# EAGLE board Sound_Module (EAGLE 7.1.0)
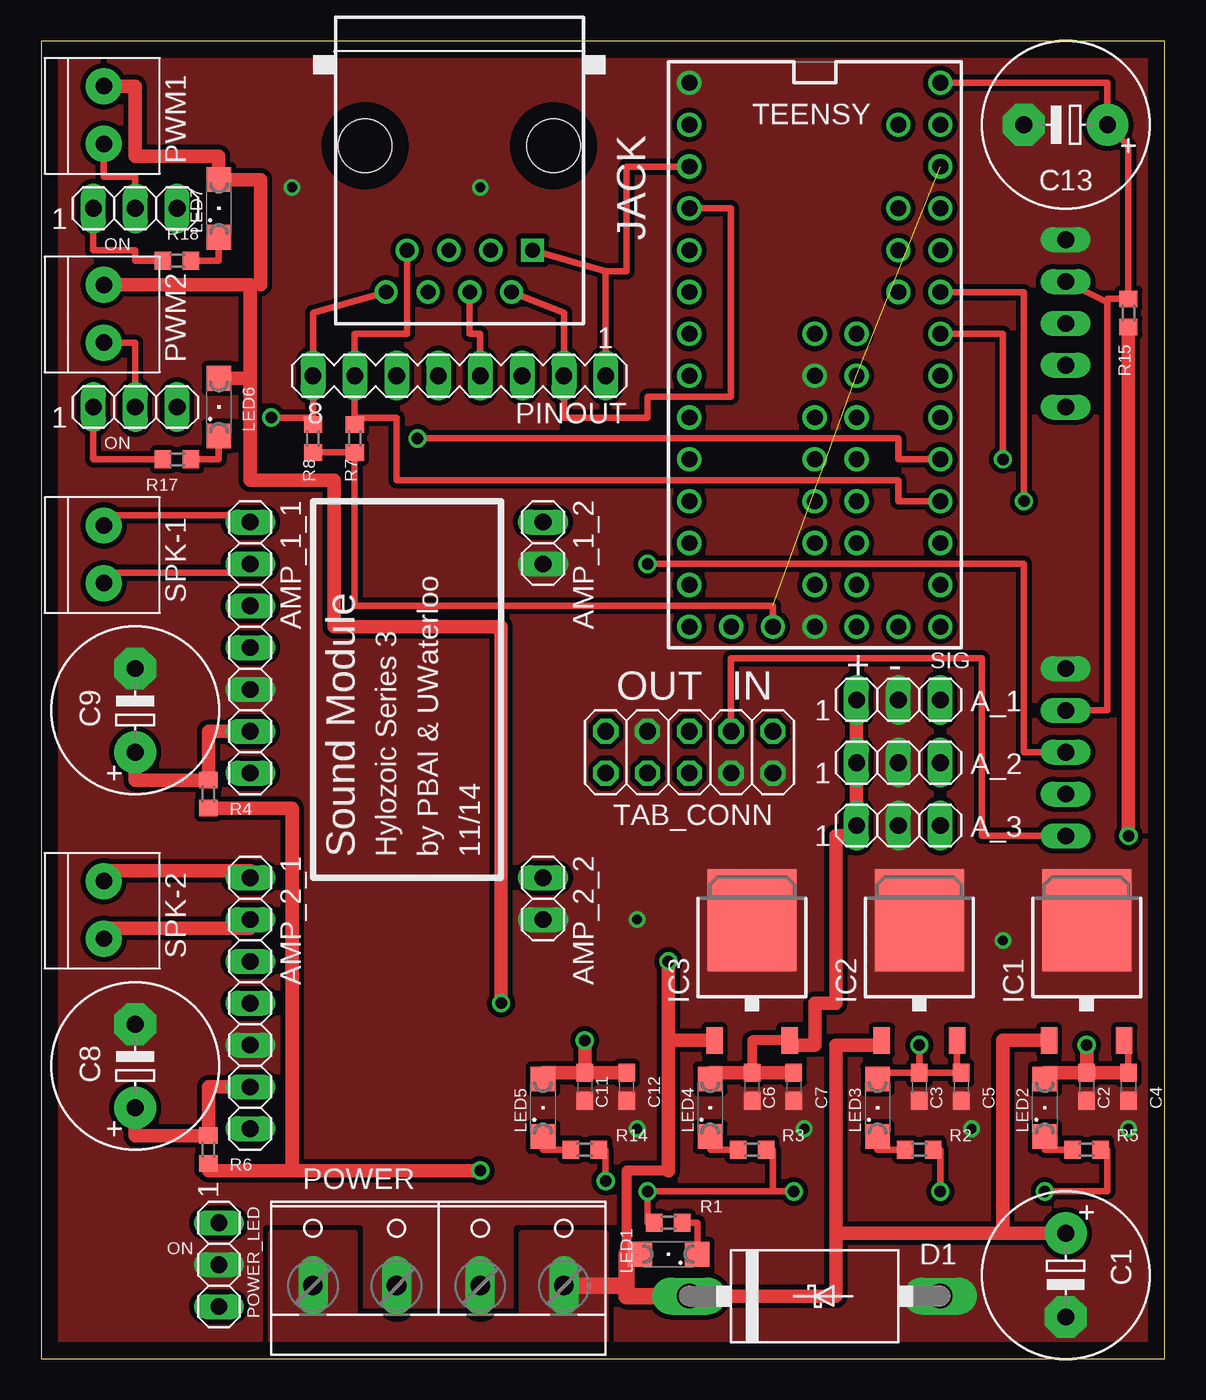
[diagram p0: board, top side]
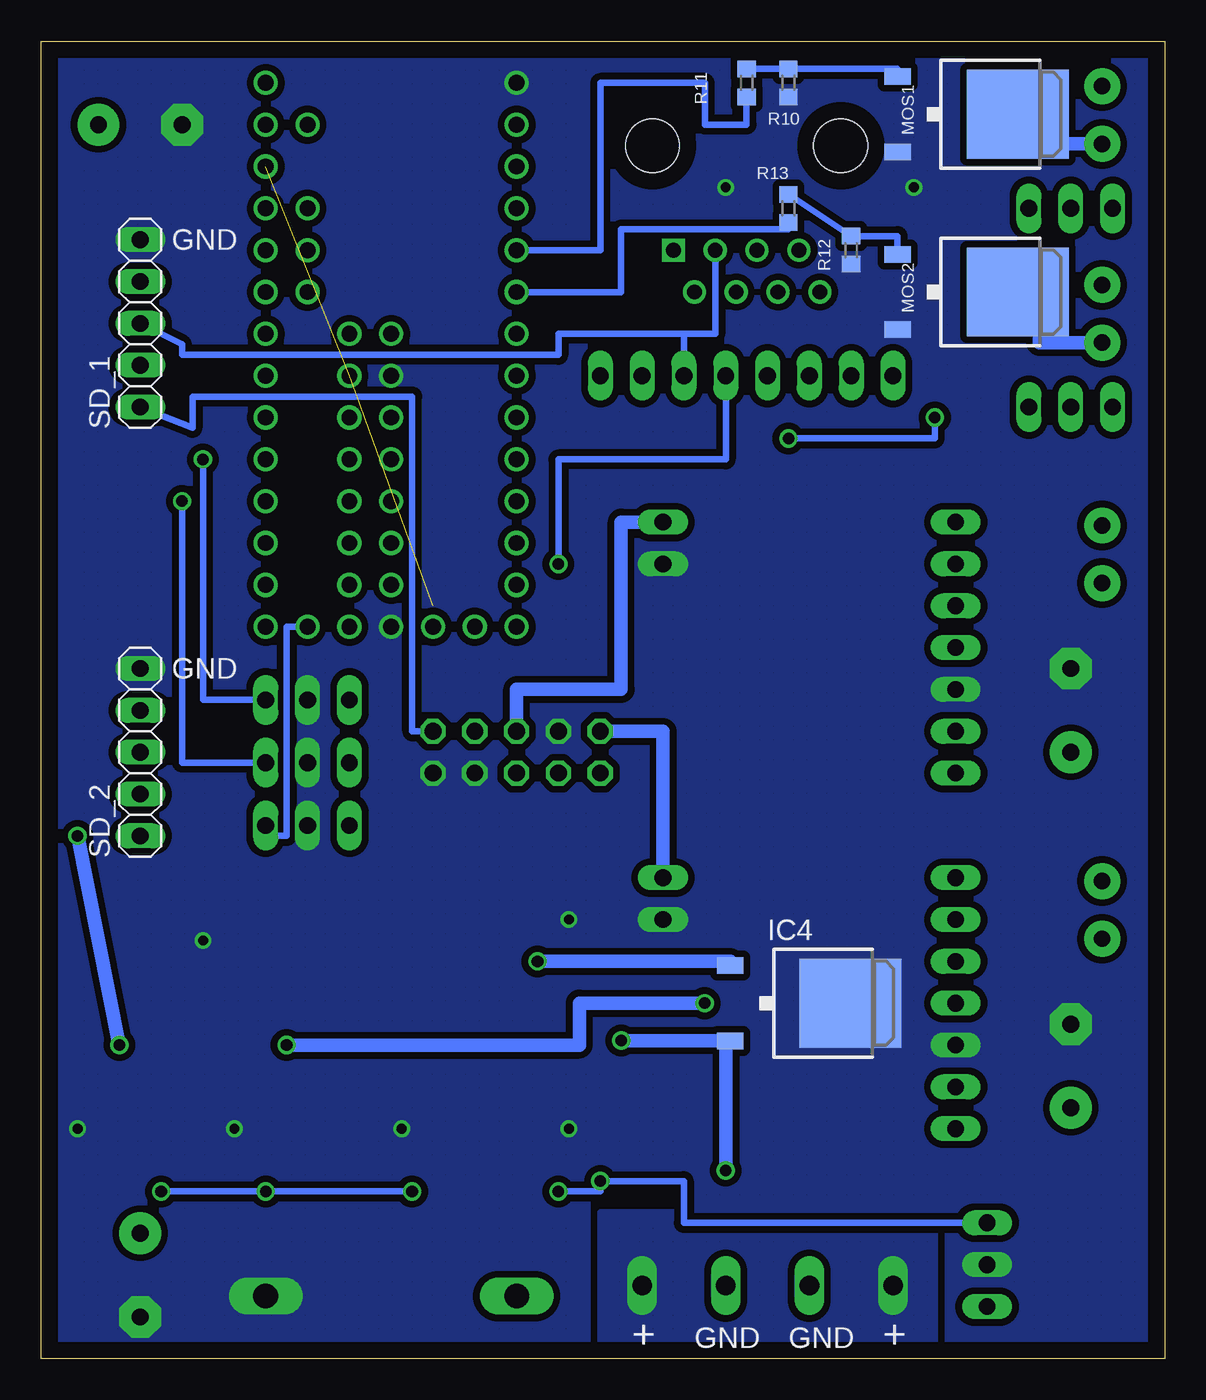
[diagram p1: board, bottom side, seen from below]

Size 68.25 x 80 mm. Coordinates in mm from the lower left corner, seen from the top.
Outline: 0,0 68.25,0 68.25,80 0,80 0,0
Copper layers (1*16): Top 0.035mm / dielectric 1.5mm / Bottom 0.035mm
Design rules "default *": minimum track width 10mil, minimum drill 20mil, track to track 8mil, track to pad 8mil, pad to pad 8mil, via to via 8mil, smd to smd 8mil, copper to edge 40mil, drill to drill 8mil, minimum pad ring 10mil, minimum via ring 8mil, stop-mask expansion 4mil, vias tented up to drill 0mil, thermal gap 10mil

## Footprints (pad centres in the part's own frame; a part is rotated, then mirrored left to right if it is on the bottom)
1X03 = drill 1.016 long: 1 -2.54,0; 2 0,0; 3 2.54,0
1X07 = drill 1.016 long: 1 -7.62,0; 2 -5.08,0; 3 -2.54,0; 4 0,0; 5 2.54,0; 6 5.08,0; 7 7.62,0
1X02 = drill 1.016 long: 1 -1.27,0; 2 1.27,0
E5-10,5 = drill 1.016 pad 2.54: + -2.54,0 | drill 1.016 pad 2.54 octagon: - 2.54,0
C0603 = smd 1.1 x 1: 1 -0.85,0; 2 0.85,0
DO201T15 = drill 1.499 long: A 7.62,0; C -7.62,0
DPACK_3 = smd 1 x 1.6: 1 -2.28,-4.8; 3 2.28,-4.8 | smd 5.4 x 6.2: 4 0,2.5
RJ45-NO-SHIELD = drill 0.9 pad 1.4 square: 1 -4.445,6.35 | drill 0.9 pad 1.4: 2 -3.175,8.89; 3 -1.905,6.35; 4 -0.635,8.89; 5 0.635,6.35; 6 1.905,8.89; 7 3.175,6.35; 8 4.445,8.89 | hole 3.251: -5.715,0; 5.715,0
SML1206 = smd 1.5 x 1.5: A 1.75,0; C -1.75,0
DPACK = smd 1 x 1.6: 1 -2.28,-4.8; 3 2.28,-4.8 | smd 5.4 x 6.2: 2 0,2.5
MA08-1 = drill 1.016 long: 1 -8.89,0; 2 -6.35,0; 3 -3.81,0; 4 -1.27,0; 5 1.27,0; 6 3.81,0; 7 6.35,0; 8 8.89,0
W237-4P = drill 1.194 long: 1 -7.62,-0.635; 2 -2.54,-0.635; 3 2.54,-0.635; 4 7.62,-0.635
1X2-3.5MM = drill 1 pad 2.184: 1 1.8,0; 2 -1.7,0
R0603 = smd 1 x 1.1: 1 -0.85,0; 2 0.85,0
1X05 = drill 1.016 long: 1 -5.08,0; 2 -2.54,0; 3 0,0; 4 2.54,0; 5 5.08,0
2X05 = drill 1.016 octagon: 1 -5.08,-1.27; 2 -5.08,1.27; 3 -2.54,-1.27; 4 -2.54,1.27; 5 0,-1.27; 6 0,1.27; 7 2.54,-1.27; 8 2.54,1.27; 9 5.08,-1.27; 10 5.08,1.27
TEENSY_3.1_ALLPINS = drill 0.965: 0 -7.62,15.24; 1 -7.62,12.7; 2 -7.62,10.16; 3 -7.62,7.62; 3.3V 7.62,12.7; 3.3V1 -2.54,-15.24; 3.3V2 2.54,0; 4 -7.62,5.08; 5 -7.62,2.54; 6 -7.62,0; 7 -7.62,-2.54; 8 -7.62,-5.08; 9 -7.62,-7.62; 10 -7.62,-10.16; 11 -7.62,-12.7; 12 -7.62,-15.24; 13 7.62,-15.24; 14/A0 7.62,-12.7; 15/A1 7.62,-10.16; 16/A2 7.62,-7.62; 17/A3 7.62,-5.08; 18/A4 7.62,-2.54; 19/A5 7.62,0; 20/A6 7.62,2.54; 21/A7 7.62,5.08; 22/A8 7.62,7.62; 23/A9 7.62,10.16; 24 0,-2.54; 25 0,-5.08; 26 0,-7.62; 27 0,-10.16; 28 0,-12.7; 29 2.54,-12.7; 30 2.54,-10.16; 31 2.54,-7.62; 32 2.54,-5.08; 33 2.54,-2.54; A10 5.08,7.62; A11 5.08,5.08; A12 0,2.54; A13 2.54,2.54; A14 5.08,-15.24; AGND 7.62,15.24; AREF 5.08,10.16; GND -7.62,17.78; GND1 0,-15.24; GND2 0,0; PGM 2.54,-15.24; VBAT -5.08,-15.24; VIN 7.62,17.78; VUSB 5.08,15.24

## Placement (x,y rotation side)
A_1  [1X03]  52.07,40.01 0 top
A_2  [1X03]  52.07,36.2 0 top
A_3  [1X03]  52.07,32.38 0 top
AMP_1_1  [1X07]  12.7,43.18 270 top
AMP_1_2  [1X02]  30.48,49.53 270 top
AMP_2_1  [1X07]  12.7,21.59 270 top
AMP_2_2  [1X02]  30.48,27.94 270 top
C1  2000uF  [E5-10,5]  62.23,5.08 270 top
C2  1uF  [C0603]  63.5,16.51 270 top
C3  1uF  [C0603]  53.34,16.51 270 top
C4  100nF  [C0603]  66.04,16.51 270 top
C5  100nF  [C0603]  55.88,16.51 270 top
C6  1uF  [C0603]  43.18,16.51 270 top
C7  100nF  [C0603]  45.72,16.51 270 top
C8  470uF  [E5-10,5]  5.71,17.78 90 top
C9  470uF  [E5-10,5]  5.71,39.37 90 top
C11  1uF  [C0603]  33.02,16.51 270 top
C12  100nF  [C0603]  35.56,16.51 270 top
C13  470uF  [E5-10,5]  62.23,74.93 180 top
D1  SB540E-G  [DO201T15]  46.99,3.81 0 top
IC1  [DPACK_3]  63.5,24.13 0 top
IC2  [DPACK_3]  53.34,24.13 0 top
IC3  [DPACK_3]  43.18,24.13 0 top
IC4  [DPACK_3]  21.59,21.59 270 bottom
JACK  RJ45-6L-B  [RJ45-NO-SHIELD]  25.4,73.66 180 top
LED1  [SML1206]  38.1,6.35 180 top
LED2  [SML1206]  60.96,15.24 90 top
LED3  [SML1206]  50.8,15.24 90 top
LED4  [SML1206]  40.64,15.24 90 top
LED5  [SML1206]  30.48,15.24 90 top
LED6  [SML1206]  10.79,57.78 90 top
LED7  [SML1206]  10.79,69.85 90 top
MOS1  [DPACK]  11.43,75.56 270 bottom
MOS2  [DPACK]  11.43,64.77 270 bottom
PINOUT  [MA08-1]  25.4,59.69 180 top
POWER  [W237-4P]  24.13,5.08 0 top
POWER_LED  [1X03]  10.79,5.71 270 top
PWM1  1X2-3.5MM  [1X2-3.5MM]  3.81,75.56 270 top
PWM2  1X2-3.5MM  [1X2-3.5MM]  3.81,63.5 270 top
R1  470  [R0603]  38.1,8.26 0 top
R2  470  [R0603]  53.34,12.7 180 top
R3  470  [R0603]  43.18,12.7 180 top
R4  10  [R0603]  10.16,34.29 270 top
R5  470  [R0603]  63.5,12.7 180 top
R6  10  [R0603]  10.16,12.7 270 top
R7  2.2k  [R0603]  19.05,55.88 270 top
R8  2.2k  [R0603]  16.51,55.88 270 top
R10  4.7K  [R0603]  22.86,77.47 90 bottom
R11  1K  [R0603]  25.4,77.47 270 bottom
R12  4.7K  [R0603]  19.05,67.31 90 bottom
R13  1K  [R0603]  22.86,69.85 270 bottom
R14  470  [R0603]  33.02,12.7 180 top
R15  10  [R0603]  66.04,63.5 270 top
R17  470  [R0603]  8.26,54.61 0 top
R18  470  [R0603]  8.26,66.67 0 top
SD_1  [1X05]  62.23,62.87 90 bottom
SD_2  [1X05]  62.23,36.83 90 bottom
SPK-1  1X2-3.5MM  [1X2-3.5MM]  3.81,48.9 270 top
SPK-2  1X2-3.5MM  [1X2-3.5MM]  3.81,27.3 270 top
TAB_CONN  [2X05]  39.37,36.83 180 top
TEENSY  AUDIO BOARD  [TEENSY_3.1_ALLPINS]  46.99,59.69 0 top
X2  [1X03]  5.71,69.85 0 top
X3  [1X03]  5.71,57.78 0 top

## Library data of the parts
A_1-A_3 D1 IC1-IC4 MOS1 MOS2 POWER_LED R1-R8 R10-R15 R17 R18 X2 X3 = CBLA_Test_bed_Library
AMP_1_1 AMP_1_2 AMP_2_1 AMP_2_2 SD_1 SD_2 TAB_CONN = pinhead
C1-C9 C11-C13 = rcl
JACK = CBLA_Test_bed_Library; MPN: RJ45-6L-B; OC_FARNELL: unknown; OC_NEWARK: 16R6090
LED1-LED7 = led
PINOUT = con-lstb; OC_FARNELL: unknown; OC_NEWARK: unknown
POWER = con-wago-508; OC_FARNELL: unknown; OC_NEWARK: unknown
PWM1 PWM2 SPK-1 SPK-2 = ActuatorBoard_v1.2
TEENSY = Teensy_3_Series_Board_v1.0

## Nets
3.3V: R7.2 R8.2 TEENSY.3.3V TEENSY.3.3V1 TEENSY.3.3V2
5VFILT: C13.+ R15.1 SD_1.4 SD_2.4 TEENSY.VIN
+5V_1: C2.1 C4.1 IC1.3 LED2.A R15.2
+5V_2: C3.1 C5.1 IC2.3 LED3.A LED6.A LED7.A PWM1.2 PWM2.2
+5V_3: A_1.1 A_2.1 A_3.1 C6.1 C7.1 IC3.3 LED4.A
+5V_4: C11.1 C12.1 IC4.3 LED5.A R4.2 R6.2
+12V: C1.+ D1.C IC1.1 IC2.1 IC3.1 IC4.1 LED1.A POWER.1 POWER.4
AGND: TEENSY.AGND
AMP_1_VIN: AMP_1_1.6 C9.+ R4.1
AMP_2_VIN: AMP_2_1.6 C8.+ R6.1
AREF: TEENSY.AREF
DPEAK_1: JACK.3 PINOUT.3 SD_1.3
DPEAK_2: JACK.4 PINOUT.4 SD_2.3
DTRIG_1: JACK.1 PINOUT.1 TEENSY.1
DTRIG_2: JACK.2 PINOUT.2 TEENSY.2
FPWM_1_1: R11.2 TEENSY.3
FPWM_1_2: R13.2 TEENSY.4
GND: A_1.2 A_2.2 A_3.2 AMP_1_1.5 AMP_1_2.2 AMP_2_1.5 AMP_2_2.2 C1.- C2.2 C3.2 C4.2 C5.2 C6.2 C7.2 C8.- C9.- C11.2 C12.2 C13.- D1.A IC1.4 IC2.4 IC3.4 IC4.4 MOS1.3 MOS2.3 POWER.2 POWER.3 POWER_LED.2 R10.1 R12.1 SD_1.5 SD_2.5 TAB_CONN.2 TAB_CONN.4 TAB_CONN.7 TEENSY.GND TEENSY.GND1 TEENSY.GND2
IN_1+: AMP_1_2.1 TAB_CONN.5
IN_2+: AMP_2_2.1 TAB_CONN.9
LED_JUMP_POW: POWER_LED.1 R1.1 R2.1 R3.1 R5.1 R14.1
MIC_1: SD_1.1 TAB_CONN.1
MIC_2: SD_2.1 TAB_CONN.3
N$1: MOS2.1 R12.2 R13.1
N$2: LED3.C R2.2
N$3: LED4.C R3.2
N$4: MOS1.1 R10.2 R11.1
N$5: MOS1.2 PWM1.1 X2.2
N$6: LED6.C R17.2
N$7: MOS2.2 PWM2.1 X3.2
N$8: LED5.C R14.2
N$9: LED7.C R18.2
N$10: LED1.C R1.2
N$12: R18.1 X2.1
N$13: R17.1 X3.1
N$19: LED2.C R5.2
SCL: JACK.7 PINOUT.7 R7.1 TEENSY.16/A2
SDA: JACK.8 PINOUT.8 R8.1 TEENSY.17/A3
SIG_1: A_1.3 TEENSY.20/A6
SIG_2: A_2.3 TEENSY.21/A7
SIG_3: A_3.3 TEENSY.A14
SPK_1+: AMP_1_1.1 SPK-1.2
SPK_1-: AMP_1_1.2 SPK-1.1
SPK_2+: AMP_2_1.1 SPK-2.2
SPK_2-: AMP_2_1.2 SPK-2.1
VBAT: TEENSY.VBAT
VUSB: TEENSY.VUSB

## Tracks (layer width: path | path; a pad name or v marks a point on that pad's centre or on a via)
3.3V  (2 unrouted)
  Top 0.406: TEENSY.3.3V1 44.45,45.72 19.05,45.72 R7.2 R8.2
5VFILT
  Top 0.406: TEENSY.VIN 64.77,77.47 C13.+ 66.04,73.66 R15.1 64.77,64.35 64.77,64.14 | SD_1.4 64.77,64.14 | 64.77,64.14 64.77,39.37 SD_2.4
+5V_1  (via drill 0.7)
  Top 0.406: 60.96,17.36 LED2.A | IC1.3 66.04,19.33 C4.1
  Top 0.813: C2.1 C4.1 | C2.1 60.96,17.36 | R15.2 v66.04,31.75 | v63.5,19.05 C2.1
  Bottom 0.813: v66.04,31.75 v63.5,19.05
+5V_2  (via drill 0.7)
  Top 0.406: C3.1 C5.1 55.62,17.36 IC2.3 | LED3.A 50.8,17.36 C3.1 | C3.1 v53.34,19.05 | 12.7,65.2 13.34,65.2
  Top 0.813: PWM1.2 5.71,77.27 5.71,73.03 10.79,73.03 LED7.A 13.34,71.6 13.34,65.2 | v27.94,21.59 27.94,44.45 17.78,44.45 17.78,53.34 12.7,53.34 12.7,59.53 | 12.7,59.53 12.7,65.2 PWM2.2 | LED6.A 12.7,59.53
  Bottom 0.813: v53.34,19.05 35.56,19.05 35.56,21.59 v27.94,21.59
+5V_3
  Top 0.406: 45.46,19.05 IC3.3 | 49.53,31.75 A_3.1
  Top 0.61: IC3.3 43.18,19.33 C6.1
  Top 0.813: C7.1 C6.1 40.64,17.36 LED4.A | 45.46,19.05 46.99,19.05 46.99,21.59 48.26,21.59 48.26,31.75 49.53,31.75 | A_3.1 A_2.1 A_1.1
+5V_4  (via drill 0.7)
  Top 0.406: 30.48,17.36 LED5.A | 10.16,11.43 R6.2
  Top 0.813: v33.02,19.33 C11.1 | C11.1 30.48,17.36 | C12.1 C11.1 | v26.67,11.43 15.24,11.43 | 15.24,11.43 10.16,11.43 | R4.2 15.24,33.44 15.24,11.43
  Bottom 0.406: 33.02,19.31 v33.02,19.33 | IC4.3 26.67,19.31
  Bottom 0.813: IC4.3 33.02,19.31 | 26.67,19.31 v26.67,11.43
+12V  (via drill 0.7)
  Top 0.406: LED1.A 35.56,6.35
  Top 0.61: 38.1,11.43 35.56,11.43 35.56,6.35 | 51.06,19.05 IC2.1
  Top 0.813: C1.+ 58.42,7.62 | IC1.1 58.42,19.33 58.42,7.62 | IC3.1 38.1,19.33 | 38.1,19.33 38.1,11.43 | 58.42,7.62 48.26,7.62 | 38.1,19.33 v38.1,24.13 | D1.C 48.26,3.81 48.26,7.62 | 48.26,7.62 48.26,19.05 51.06,19.05
  Top 1.016: D1.C 35.56,3.81 35.56,4.45 | POWER.4 35.56,4.45 | 35.56,4.45 35.56,6.35
  Bottom 0.406: 26.39,24.13 IC4.1
  Bottom 0.813: v38.1,24.13 26.39,24.13
  pour Bottom (isolate 0.406, no thermals, hatched): 13.97,8.89 13.97,1.27 13.97,0 34.29,0 34.29,8.89
  pour Top (isolate 0.406, no thermals, hatched): 13.97,7.62 13.97,1.27 13.97,0 34.29,0 34.29,7.62 29.21,7.62 29.21,2.54 19.05,2.54 19.05,7.62
AMP_1_VIN
  Top 0.813: AMP_1_1.6 10.16,38.1 R4.1 5.71,35.14 C9.+
AMP_2_VIN
  Top 0.813: AMP_2_1.6 10.16,16.51 R6.1 5.71,13.55 C8.+
DPEAK_1
  Bottom 0.406: JACK.3 27.3,62.23 29.21,62.23 | 29.21,62.23 PINOUT.3 | 29.21,62.23 36.83,62.23 36.83,60.96 59.69,60.96 59.69,61.59 SD_1.3
DPEAK_2  (via drill 0.7)
  Top 0.406: JACK.4 26.04,62.23 26.67,62.23 PINOUT.4 | v36.83,48.26 59.69,48.26 59.69,36.83 SD_2.3
  Bottom 0.406: PINOUT.4 26.67,54.61 36.83,54.61 v36.83,48.26
DTRIG_1
  Top 0.406: PINOUT.1 34.29,66.04 | 34.29,66.04 JACK.1 | TEENSY.1 35.56,72.39 35.56,66.04 34.29,66.04
DTRIG_2
  Top 0.406: JACK.2 31.75,63.5 PINOUT.2 31.75,57.15 36.83,57.15 36.83,58.42 41.91,58.42 41.91,69.85 TEENSY.2
FPWM_1_1
  Bottom 0.406: TEENSY.3 34.29,67.31 34.29,77.47 27.94,77.47 27.94,74.93 25.4,74.93 R11.2
FPWM_1_2
  Bottom 0.406: TEENSY.4 33.02,64.77 33.02,68.58 22.86,68.58 R13.2
GND  (via drill 0.6)
  other vias: 36.2,13.97 46.35,13.97 56.52,13.97 66.04,13.97 36.2,26.67 58.42,25.4 15.24,71.12 26.67,71.12
  pour Bottom (isolate 0.406, rank 3, no thermals, hatched): 0,0 0,80.01 68.58,80.01 68.58,0
  pour Top (isolate 0.305, rank 3, no thermals, hatched): 0,0 0,80.01 68.58,80.01 68.58,0 1.27,0
IN_1+
  Bottom 0.813: TAB_CONN.5 39.37,40.64 33.02,40.64 33.02,50.8 AMP_1_2.1
IN_2+
  Bottom 0.813: TAB_CONN.9 30.48,38.1 AMP_2_2.1
LED_JUMP_POW  (via drill 0.7)
  Top 0.406: R14.1 34.29,12.7 v34.29,10.79 | R1.1 36.83,8.26 v36.83,10.16 44.45,10.16 | R3.1 44.45,12.7 44.45,10.16 | R2.1 54.61,12.7 v54.61,10.16 | v45.72,10.16 44.45,10.16 | R5.1 64.77,12.7 64.77,10.16 v60.96,10.16
  Bottom 0.406: POWER_LED.1 29.21,8.26 29.21,10.79 v34.29,10.79 34.29,10.16 v36.83,10.16 | v45.72,10.16 v54.61,10.16 v60.96,10.16
MIC_1
  Bottom 0.406: TAB_CONN.1 45.72,38.1 45.72,58.42 59.05,58.42 59.05,56.52 SD_1.1
MIC_2
  Top 0.406: TAB_CONN.3 41.91,42.55 57.15,42.55 57.15,31.75 SD_2.1
N$1
  Bottom 0.406: R13.1 R12.2 16.23,68.16 MOS2.1
N$2
  Top 0.406: R2.2 50.8,12.7 LED3.C
N$3
  Top 0.406: R3.2 40.64,12.7 LED4.C
N$4
  Bottom 0.406: MOS1.1 16.23,78.32 R10.2 R11.1
N$5
  Top 0.406: PWM1.1 3.81,71.75 5.71,71.75 X2.2
  Bottom 0.406: 8.93,73.13 8.93,73.66 MOS1.2
  Bottom 0.813: PWM1.1 8.93,73.77 8.93,73.66
N$6
  Top 0.406: R17.2 10.79,54.61 LED6.C
N$7
  Top 0.406: PWM2.1 5.71,61.7 X3.2
  Bottom 0.406: 8.93,62.97 MOS2.2
  Bottom 0.813: PWM2.1 7.62,61.7 7.62,62.97 | 8.93,62.97 7.62,62.97 | 7.62,62.97 7.62,63.5
N$8
  Top 0.406: R14.2 30.48,12.7 LED5.C
N$9
  Top 0.406: R18.2 10.79,66.67 LED7.C
N$10
  Top 0.406: R1.2 39.85,8.26 LED1.C
N$12
  Top 0.406: X2.1 3.17,67.31 5.71,67.31 5.71,66.67 R18.1
N$13
  Top 0.406: X3.1 3.17,54.61 R17.1
N$19
  Top 0.406: R5.2 60.96,12.7 LED2.C
SCL
  Top 0.406: TEENSY.16/A2 52.07,52.07 52.07,53.34 21.59,53.34 21.59,57.15 19.05,57.15 R7.1 PINOUT.7 19.05,62.23 22.23,62.23 JACK.7
SDA  (via drill 0.7)
  Top 0.406: JACK.8 16.51,63.5 PINOUT.8 16.51,57.15 | TEENSY.17/A3 52.07,54.61 52.07,55.88 v22.86,55.88 | v13.97,57.15 16.51,57.15 | 16.51,57.15 R8.1
  Bottom 0.406: v22.86,55.88 13.97,55.88 v13.97,57.15
SIG_1  (via drill 0.7)
  Top 0.406: v58.42,54.61 58.42,62.23 TEENSY.20/A6
  Bottom 0.406: A_1.3 58.42,40.01 v58.42,54.61
SIG_2  (via drill 0.7)
  Top 0.406: v59.69,52.07 59.69,64.77 TEENSY.21/A7
  Bottom 0.406: A_2.3 59.69,36.2 v59.69,52.07
SIG_3
  Bottom 0.406: TEENSY.A14 53.34,44.45 53.34,31.75 54.61,31.75 A_3.3
SPK_1+
  Top 0.406: AMP_1_1.1 12.7,51.23 3.81,51.23 SPK-1.2
SPK_1-
  Top 0.406: AMP_1_1.2 12.7,47.73 3.81,47.73 SPK-1.1
SPK_2+
  Top 0.813: AMP_2_1.1 12.7,29.64 3.81,29.64 SPK-2.2
SPK_2-
  Top 0.813: AMP_2_1.2 12.7,26.14 3.81,26.14 SPK-2.1

## Text on the board
tNames: ON | ON | SIG | + | - | OUT | IN | Sound Module | Hylozoic Series 3 | by PBAI & UWaterloo | 11/14 | ON
bNames: GND | GND | + | GND | GND | +